# Altium PCB bluetooth_clock.PcbDoc
Units mm, origin at the board's own origin, x right, y up, seen from the top; angles counter-clockwise.
Board outline 80 x 50.01 mm, 2 copper layers (Top Layer, Bottom Layer); 56 components, 45 nets, 263 pads, 11 vias.
Unrouted connection lines stored in the file: 127.
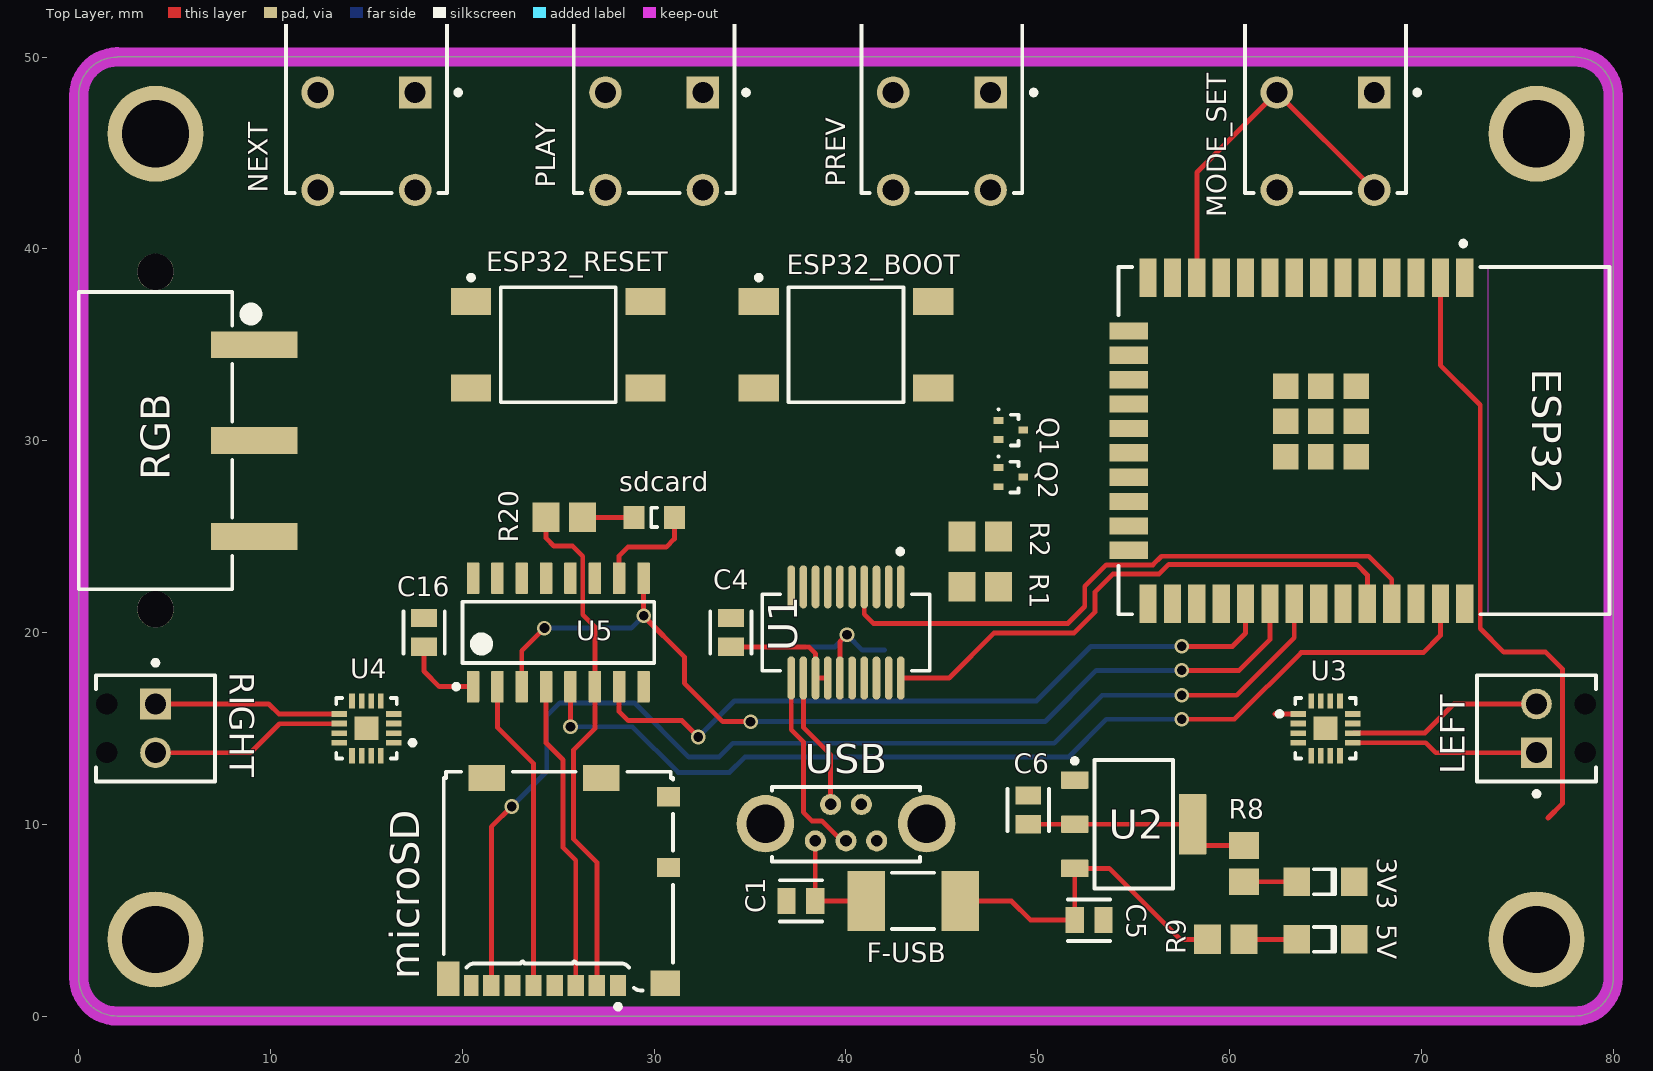
[diagram p0: Top Layer view]
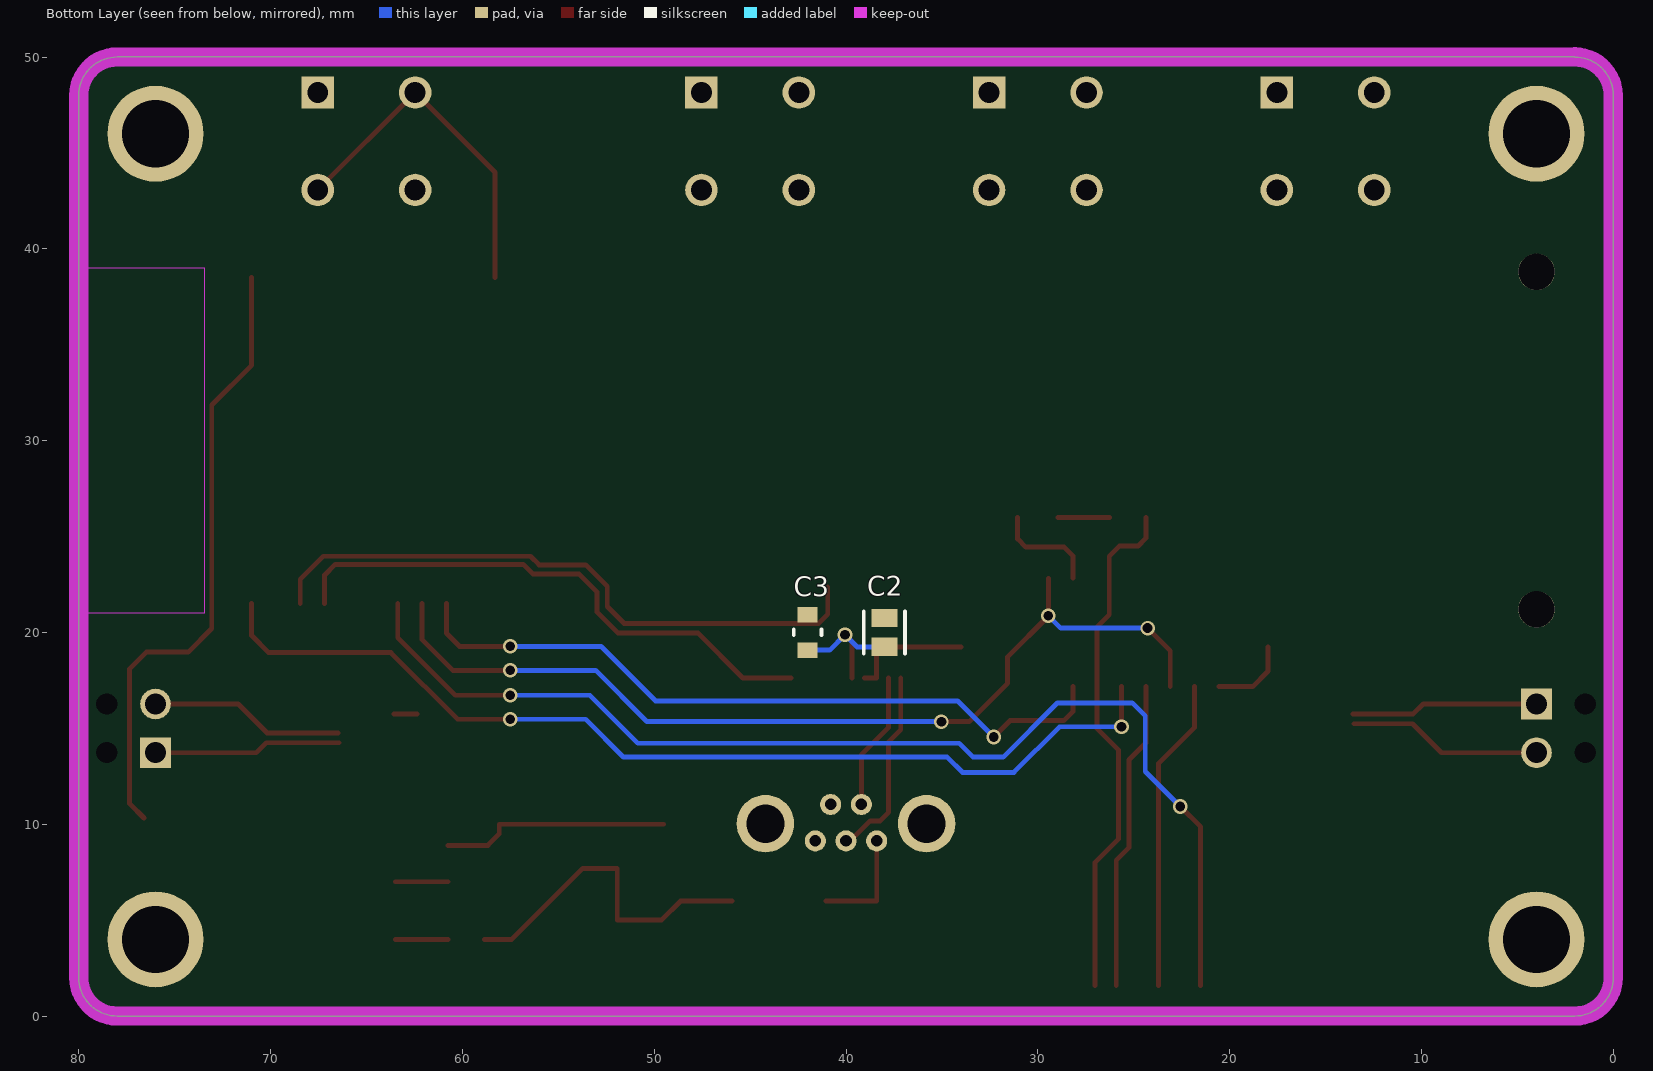
[diagram p1: Bottom Layer view, seen from below]

## Layer stack, top to bottom
Top Solder: solder mask 0.0102, Solder Resist, Dk 3.5
Top Layer: signal copper 0.0356
Dielectric 1: dielectric 0.32, FR-4, Dk 4.8
Bottom Layer: signal copper 0.0356
Bottom Solder: solder mask 0.0102, Solder Resist, Dk 3.5

## Board outline
78,50 cw(c78,48) 80,48 80,2 cw(c78,2) 78,0 2,0 cw(c2,2) 0,2 0,48 cw(c2,48) 2,50 2,50.013

## Design rules (kind name [scope] priority, off if disabled: settings)
Clearance [All] p1: gap=0.254 ignorepadtopadclearanceinfootprint=FALSE except(0: Arc-Hole Track-Hole SMDPad-Hole THPad-Hole Via-Hole Fill-Hole Poly-Hole Region-Hole Text-Hole; 0.127: Arc-Arc Arc-Track Arc-SMDPad Track-Track Track-SMDPad SMDPad-SMDPad)
PolygonConnect [All] p1: connectstyle=Relief reliefconductorwidth=0.254 reliefentries=4 polygonreliefangle="90 Angle" airgapwidth=0.254
RoutingVias [All] p1: holewidth=0.711 width=1.27 viastyle="Through Hole" minholewidth=0.711 minwidth=1.27 maxholewidth=0.711 maxwidth=1.27
SolderMaskExpansion [All] p1: expansion=0.102 istentingtop=FALSE
Width [All] p1: maxlimit=0.254 minlimit=0.254 preferedwidth=0.254
30 further rules are at their usual default settings.

## Classes and differential pairs
component class USB-ESP32: 3V3 5V C1 C2 C3 C4 C5 C6 ESP32-RX ESP32-TX F-USB Q1 Q2 R1 R2 R3 R4 R8 R9 U1 U2 USB
component class sd_card: C16 microSD R20 sdcard U5
component class ESP32: C7 ESP32 ESP32_BOOT ESP32_RESET MODE_SET NEXT PLAY PREV R12 R13 R15 R16 R17 R18 RGB
component class audio: C8 C9 C10 C11 C12 C13 C14 C15 LEFT R14 R19 RIGHT U3 U4

## Components (designator, comment, footprint, x,y, rotation, side; value= is the part's Value field where it differs from the comment)
3V3 "150120GS75000" 1206_A 65,7 r180 top
5V "150120GS75000" 1206_A 65,4 r180 top
C1 "10uF 10V 0805" FP-C0805C-DG-MFG 37.65,6 r180 top value=10uF
C2 "0.1uF 50V 0805" FP-C0805C-DN-MFG 38,20 r90 bottom value="0.10 μF"
C3 "4.7uF 50V 0805" FP-C2012-125-MFG 42,20 r90 bottom value=4.7uF
C4 "0.1uF 50V 0805" FP-C0805C-DN-MFG 34,20 r90 top value="0.10 μF"
C5 "10uF 10V 0805" FP-C0805C-DG-MFG 52.675,5 r0 top value=10uF
C6 "10uF 10V 0805" FP-C0805C-DG-MFG 49.5,10.75 r90 top value=10uF
C7 "10uF 10V 0805" FP-C0805C-DG-MFG 221.234,37.694 r0 top value=10uF
C8 "0.1uF 50V 0805" FP-C0805C-DN-MFG 160.934,7.163 r0 top value="0.10 μF"
C9 "10uF 10V 0805" FP-C0805C-DG-MFG 165.227,7.163 r0 top value=10uF
C10 "220pF 25V 0805" CAPC2013X94X50LL20T25 122.326,6.909 r90 top
C11 "220pF 25V 0805" CAPC2013X94X50LL20T25 128.473,7.468 r0 top
C12 "0.1uF 50V 0805" FP-C0805C-DN-MFG 111.785,7.163 r0 top value="0.10 μF"
C13 "10uF 10V 0805" FP-C0805C-DG-MFG 117.373,7.163 r0 top value=10uF
C14 "220pF 25V 0805" CAPC2013X94X50LL20T25 90.9,14.8 r90 top
C15 "220pF 25V 0805" CAPC2013X94X50LL20T25 85.9,14.675 r90 top
C16 "10uF 10V 0805" FP-C0805C-DG-MFG 18,20 r90 top value=10uF
ESP32 "ESP32-WROOM-32D" FP-ESP32-WROOM-32D-MFG 67,30 r270 top
ESP32-RX "150080YS75000" 0805_A 136.322,69.825 r90 top
ESP32-TX "150080YS75000" 0805_A 168.377,69.825 r90 top
ESP32_BOOT "FSM4JSMA" TECO-FSM4JSMA_V 40,35 r90 top
ESP32_RESET "FSM4JSMA" TECO-FSM4JSMA_V 25,35 r90 top
F-USB "0451002.MRL" FP-0451-MFG 43.5,6 r0 top value=0.0367Ω
LEFT "1725656" PHOE-1725656-2 76,15 r90 top
microSD "104031-0811" MOLX-104031-0811_V 25,7 r0 top
MODE_SET "1825096-4" FP-1825096-4-MFG 65,49 r270 top
NEXT "1825096-4" FP-1825096-4-MFG 15,49 r270 top
PLAY "1825096-4" FP-1825096-4-MFG 30,49 r270 top
PREV "1825096-4" FP-1825096-4-MFG 45,49 r270 top
Q1 "MMBT2222ATT1G" ONSC-SC-75-3-463-01_V 48.6,30.55 r0 top
Q2 "MMBT2222ATT1G" ONSC-SC-75-3-463-01_V 48.597,28.095 r0 top
R1 "10K 5% 0805" RESC2013X60X40ML20T25 47,22.375 r180 top
R2 "10K 5% 0805" RESC2013X60X40ML20T25 47,25 r180 top
R3 "330R 5% 0805" RESC2013X60X40ML20T25 164.033,70.256 r0 top
R4 "330R 5% 0805" RESC2013X60X40ML20T25 131.978,70.256 r0 top
R8 "1K 5% 0805" RESC2013X60X40ML20T25 60.75,7.95 r90 top
R9 "1K 5% 0805" RESC2013X60X40ML20T25 59.8,4 r180 top
R12 "10K 5% 0805" RESC2013X60X40ML20T25 189.179,37.541 r0 top
R13 "10K 5% 0805" RESC2013X60X40ML20T25 194.793,37.541 r0 top
R14 "0R 0805" RESC2013X60X35NL10T20 149.53,7.366 r0 top
R15 "10K 5% 0805" RESC2013X60X40ML20T25 94.907,21.766 r0 top
R16 "10K 5% 0805" RESC2013X60X40ML20T25 100.52,21.766 r0 top
R17 "10K 5% 0805" RESC2013X60X40ML20T25 106.159,21.766 r0 top
R18 "10K 5% 0805" RESC2013X60X40ML20T25 111.772,21.766 r0 top
R19 "370K 1% 0805" RESC2013X60X35NL10T20 100.406,7.366 r0 top
R20 "1K 5% 0805" RESC2013X60X40ML20T25 25.315,26 r180 top
RGB "691709710303" 691709710303 4,30 r270 top
RIGHT "1725656" PHOE-1725656-2 4,15 r270 top
sdcard "150080YS75000" 0805_A 30,26 r0 top
U1 "FT231XS-R" FP-SSOP-20-MFG 40,20 r270 top
U2 "LM1117MP-3.3/NOPB" DCY0004A_L 55,10 r0 top
U3 "MAX98357AETE+" FP-T1633-4-MFG 65,15 r0 top
U4 "MAX98357AETE+" FP-T1633-4-MFG 15,15 r180 top
U5 "CD74HC4050M" D0016A_M 25,20 r90 top
USB "651005136421" 651005136421 40,10 r0 top

## Footprints (in the part's own frame and the unit in brackets; to place one, negate y for a bottom-side part, rotate by r counter-clockwise, add the part's x,y. Pads: shape width x height; smd on the part's side, far side on the other; paste and mask are expansions set on the pad)
0805_A [mm] "Chip LED, 2-Leads, Body 2.0x1.3mm, IPC Medium Density"
  rect 1.1x1.2 smd: 1(-1.05,0) 2(1.05,0)
  silkscreen extent -0.15,-0.5 0.15,0.5, body extent -1,-0.62 1,0.63, height 0.68
1206_A [mm] "Chip LED, 2-Leads, Body 3.2x1.6mm, IPC Medium Density"
  rect 1.4x1.5 smd: 1(-1.5,0) 2(1.5,0)
  silkscreen extent -0.5,-0.67 0.6,0.65, body extent -1.6,-0.8 1.6,0.8, height 0.68
651005136421 [mm] "Mini USB 2.0 Type B Vertical 5 Contacts"
  round 1.1 hole 0.6: 1(-1.6,-0.87) 2(-0.8,1.03) 3(0,-0.87) 4(0.8,1.03) 5(1.6,-0.87)
  round 3 hole 2: Shell(-4.2,0.03) Shell(4.2,0.03)
  silkscreen extent -3.85,-1.95 3.85,1.95, body extent -5.1,-1.92 5.1,1.98, height 9.4
691709710303 [mm] "Horizontal Entry SMT with Pressure Clamp, pitch 5mm, 03p"
  rect 1.4x4.5 smd: 1(-5,5.15) 2(0,5.15) 3(5,5.15)
  round 1.9 hole 1.9 unplated: M1(-8.8,0) M2(8.8,0)
  silkscreen extent -7.75,-4 7.75,5.17, body extent -9.5,-4 9.5,7, height 9.95
CAPC2013X94X50LL20T25 [mm] "Chip Capacitor, 2-Leads, Body 2.01x1.25mm, IPC High Density"
  rect 1.15x1.35 smd: 1(-0.725,0) 2(0.725,0)
  body extent -1.1,-0.72 1.1,0.72, height 0.94
D0016A_M [mm] "SOIC, 16-Leads, Body 10x4mm, Pitch 1.27mm, IPC Low Density"
  rrect15% 1.65x0.65 smd: 1(-2.825,4.445) 2(-2.825,3.175) 3(-2.825,1.905) 4(-2.825,0.635) 5(-2.825,-0.635) 6(-2.825,-1.905) 7(-2.825,-3.175) 8(-2.825,-4.445) 9(2.825,-4.445) 10(2.825,-3.175) 11(2.825,-1.905) 12(2.825,-0.635) 13(2.825,0.635) 14(2.825,1.905) 15(2.825,3.175) 16(2.825,4.445)
  silkscreen extent -2.95,-5 1.6,5.44, body extent -3,-4.95 3,4.95, height 1.59
DCY0004A_L [mm] "SOT223, 4-Leads, Body 6.7x3.7mm, Pitch 2.3mm, IPC High Density"
  rrect11% 1.45x0.9 smd: 1(-3.075,2.3) 2(-3.075,0) 3(-3.075,-2.3)
  rrect7% 1.45x3.15 smd: 4(3.075,0)
  silkscreen extent -3.2,-3.35 2.05,3.42, body extent -3.5,-3.25 3.5,3.25, height 1.62
FP-0451-MFG [mil]
  rect 77x124 smd paste+0 mask+0: 1(-96.5,0) 2(96.5,0)
  silkscreen extent -43,-58 43,58, body extent -139,-66 139,66, height 10
FP-1825096-4-MFG [mil]
  rect 66.62x66.62 hole 43 paste-39370.1 mask+0: 1(33.5,100)
  round 66.62 hole 43 paste-39370.1 mask+0: 3(33.5,-100) 4(233.5,-100) 5(233.5,100)
  silkscreen extent -260,-165 240,193, body extent -263,-169 271,169, height 10
FP-C0805C-DG-MFG [mm]
  rect 0.95x1.35 smd paste+0 mask+0: 1(-0.75,0) 2(0.75,0)
  silkscreen extent -1.11,-1.08 1.1,1.07, body extent -1.4,-0.85 1.4,0.85, height 0.25
FP-C0805C-DN-MFG [mm]
  rect 0.95x1.35 smd paste+0 mask+0: 1(-0.75,0) 2(0.75,0)
  silkscreen extent -1.1,-1.07 1.1,1.07, body extent -1,-0.63 1,0.63, height 0.88
FP-C2012-125-MFG [mm]
  rect 0.8x1.05 smd paste+0 mask+0: 1(-0.925,0) 2(0.925,0)
  silkscreen extent -0.15,-0.72 0.15,0.72, body extent -1.01,-0.72 0.99,0.73, height 1.45
FP-ESP32-WROOM-32D-MFG [mm]
  rect 2x0.9 smd paste+0 mask+0: 1(-8.5,5.26) 2(-8.5,3.99) 3(-8.5,2.72) 4(-8.5,1.45) 5(-8.5,0.18) 6(-8.5,-1.09) 7(-8.5,-2.36) 8(-8.5,-3.63) 9(-8.5,-4.9) 10(-8.5,-6.17) 11(-8.5,-7.44) 12(-8.5,-8.71) 13(-8.5,-9.98) 14(-8.5,-11.25) 25(8.5,-11.25) 26(8.5,-9.98) 27(8.5,-8.71) 28(8.5,-7.44) 29(8.5,-6.17) 30(8.5,-4.9) 31(8.5,-3.63) 32(8.5,-2.36) 33(8.5,-1.09) 34(8.5,0.18) 35(8.5,1.45) 36(8.5,2.72) 37(8.5,3.99) 38(8.5,5.26)
  rect 0.9x2 smd paste+0 mask+0: 15(-5.715,-12.25) 16(-4.445,-12.25) 17(-3.175,-12.25) 18(-1.905,-12.25) 19(-0.635,-12.25) 20(0.635,-12.25) 21(1.905,-12.25) 22(3.175,-12.25) 23(4.445,-12.25) 24(5.715,-12.25)
  rect 1.33x1.33 smd paste+0 mask+0: 39(-2.835,-0.405) 39(-2.835,-2.24) 39(-2.835,-4.075) 39(-1,-0.405) 39(-1,-2.24) 39(-1,-4.075) 39(0.835,-0.405) 39(0.835,-2.24) 39(0.835,-4.075)
  Keep-Out Layer region: -9,6.45 9,6.45 9,12.75 -9,12.75
  Keep-Out Layer region: -9,6.45 9,6.45 9,12.75 -9,12.75
  silkscreen extent -10.4,-12.8 9.05,12.8, body extent -9.6,-13.35 9.6,12.9, height 0.25
FP-SSOP-20-MFG [mm]
  rrect100% 2.25x0.4 smd paste+0 mask+0: 1(-2.375,2.857) 2(-2.375,2.222) 3(-2.375,1.587) 4(-2.375,0.952) 5(-2.375,0.317) 6(-2.375,-0.318) 7(-2.375,-0.953) 8(-2.375,-1.588) 9(-2.375,-2.223) 10(-2.375,-2.858) 11(2.375,-2.857) 12(2.375,-2.222) 13(2.375,-1.587) 14(2.375,-0.952) 15(2.375,-0.317) 16(2.375,0.318) 17(2.375,0.953) 18(2.375,1.588) 19(2.375,2.223) 20(2.375,2.858)
  silkscreen extent -4.34,-4.37 1.99,4.37, body extent -3.6,-4.62 3.6,4.62, height 0.25
FP-T1633-4-MFG [mm]
  rect 0.8x0.3 smd paste+0 mask+0: 1(-1.425,0.75) 2(-1.425,0.25) 3(-1.425,-0.25) 4(-1.425,-0.75) 9(1.425,-0.75) 10(1.425,-0.25) 11(1.425,0.25) 12(1.425,0.75)
  rect 0.3x0.8 smd paste+0 mask+0: 5(-0.75,-1.425) 6(-0.25,-1.425) 7(0.25,-1.425) 8(0.75,-1.425) 13(0.75,1.425) 14(0.25,1.425) 15(-0.25,1.425) 16(-0.75,1.425)
  rect 1.23x1.23 smd paste+0 mask+0: 17(0,0)
  silkscreen extent -2.52,-1.58 1.58,1.58, body extent -1.92,-1.92 1.92,1.92, height 0.25
MOLX-104031-0811_V [mm] "Micro SD, 8-Leads, Body 11.95x11.4mm, Pitch 1.1mm"
  rect 0.85x1.1 smd: 1(3.113,-5.412) 2(2.013,-5.412) 3(0.913,-5.412) 4(-0.188,-5.412) 5(-1.288,-5.412) 6(-2.387,-5.412) 7(-3.487,-5.412)
  rect 0.75x1.1 smd: 8(-4.537,-5.412)
  rect 1.2x1 smd: 9(5.748,0.738) 10(5.748,4.438)
  rect 1.55x1.35 smd: 11(5.573,-5.287)
  rect 1.17x1.8 smd: 12(-5.747,-5.062)
  rect 1.9x1.35 smd: 13(-3.722,5.413) 14(2.248,5.413)
  silkscreen extent -5.97,-6.64 5.98,5.74, body extent -5.97,-5.66 5.98,5.74, height 1.45
ONSC-SC-75-3-463-01_V [mil] "SOT23, 3-Leads, Body 1.6x0.8mm, Pitch 0.5mm"
  rect 20x14.02 smd: 1(-25.49,19.68) 2(-25.49,-19.69) 3(25.49,0)
  silkscreen extent -27,-31 16,44, body extent -16,-31 16,31, height 35
PHOE-1725656-2 [mm] "Connector, 2-Leads, Body 6.2x5.4mm, Pitch 2.54mm"
  rect 1.6x1.6 hole 1.1: 1(-1.27,0)
  round 1.6 hole 1.1: 2(1.27,0)
  round 0 hole 1.1 unplated: MH1(-1.27,-2.54) MH2(1.27,-2.54)
  silkscreen extent -3.54,-3.1 2.77,3.1, body extent -2.77,-3.1 2.77,3.1, height 9
RESC2013X60X35NL10T20 [mm] "Chip Resistor, 2-Leads, Body 2.00x1.25mm, IPC Medium Density"
  rect 1x1.35 smd: 1(-0.9,0) 2(0.9,0)
  silkscreen extent -0.1,-0.58 0.1,0.58, body extent -1.05,-0.67 1.05,0.67, height 0.6
RESC2013X60X40ML20T25 [mm] "Chip Resistor, 2-Leads, Body 2.00x1.25mm, IPC Low Density"
  rect 1.4x1.55 smd: 1(-0.95,0) 2(0.95,0)
  body extent -1.1,-0.72 1.1,0.72, height 0.6
TECO-FSM4JSMA_V [mm] "SMD, 4-Leads, Body 6x6mm, Pitch 4.5mm"
  rect 1.4x2.1 smd: 1(2.25,4.55) 2(2.25,-4.55) 3(-2.25,4.55) 4(-2.25,-4.55)
  silkscreen extent -3,-3 3.62,4.67, body extent -3,-5 3,5, height 5.08

## Part data
3V3 5V: library part CMP-1426-00014-1, "SMD mono-color Chip LED, WL-SMCW, Green", Color=Green, Manufacturer="Wuerth Elektronik", ComponentLink1Description="Manufacturer URL", ComponentLink1URL=http://www.we-online.com, ComponentLink2Description=Datasheet, ComponentLink2URL=http://katalog.we-online.com/led/datasheet/150120GS75000.pdf, PackageReference=1206_A, PartNumber=150120GS75000
C1 C5 C6 C7 C9 C13 C16: library part CMP-2007-03243-2, "CAP CER 10UF 10V X5R 0805", 3DS Part Number=220-00001, Capacitance=10uF, Manufacturer=Kemet, Manufacturer Part Number=C0805C106K8PACTU, Package=C0805C-DG, Temperature="-55°C to +85°C", Temperature Characteristic=X5R, Temperature Coefficient=15%, Temperature Range High=+85°C, Temperature Range Low=-55°C, Tolerance=10%, Voltage=10V, Automotive=No, Category=Cap, ComponentLink2Description=Datasheet, ComponentLink2URL=https://content.kemet.com/datasheets/KEM_C1006_X5R_SMD.pdf, Device Class L1="Passive Components", Device Class L2=Capacitors, Device Class L3="Ceramic Capacitors", Digikey Description="CAP CER 10UF 10V X5R 0805", Height=1.4mm, Ipc Land Pattern Name=CAPC200125X125, Lead Free=Yes, Material=Ceramic, Mouser Description="CAP CER 10UF 10V X5R 0805", Octopart=https://octopart.com/c0805c106k8pactu-kemet-98697, RoHS=TRUE, Voltage Rating=10V
C2 C4 C8 C12: library part CMP-2007-00279-2, "CAP CER 0.1UF 50V X7R 0805", Capacitance="0.10 μF", Manufacturer=KEMET, Manufacturer Part Number=C0805C104K5RACTU, Package=C0805C-DN, Temperature="-55°C to +125°C", Temperature Characteristic=X7R, Temperature Coefficient=30ppm/°C, Temperature Range High=+125°C, Temperature Range Low=-55°C, Tolerance=0.1, Voltage Rating="50 V", Automotive=No, Category=Cap, ComponentLink2Description=Datasheet, ComponentLink2URL=https://content.kemet.com/datasheets/KEM_C1003_C0G_SMD.pdf, Device Class L1="Passive Components", Device Class L2=Capacitors, Device Class L3="Ceramic Capacitors", Digikey Description="CAP CER 0.1UF 50V X7R 0805", Height=0.88mm, Ipc Land Pattern Name=CAPC200125X78, Lead Free=Yes, Material=Ceramic, Mouser Description="Cap Ceramic 0.1uF 50V X7R 10% SMD 2.0 x 1.2 mm 125 C Paper T/R", Octopart=https://octopart.com/c0805c104k5ractu-kemet-143926, RoHS=TRUE
C3: library part CMP-08246-000007-1, "CAP CER 4.7UF 50V X5R 0805", Capacitance=4.7uF, Manufacturer="TDK Corporation", Manufacturer Part Number=C2012X5R1H475K125AB, Package=C2012-125, Temperature="-55°C to +85°C", Temperature Characteristic=X5R, Temperature Coefficient=15%, Temperature Range High=+85°C, Temperature Range Low=-55°C, Tolerance=10%, Voltage Rating=50V, Automotive=No, Category=Cap, ComponentLink2Description=Datasheet, ComponentLink2URL=https://product.tdk.com/info/en/catalog/datasheets/mlcc_commercial_general_en.pdf, Device Class L1="Passive Components", Device Class L2=Capacitors, Device Class L3="Ceramic Capacitors", Digikey Description="CAP CER 4.7UF 50V X5R 0805", Height=1.45mm, Lead Free=Yes, Material=Ceramic, Mouser Description="Multilayer Ceramic Capacitors MLCC - SMD/SMT 0805 4.7uF 50volts X5R 10%", Octopart=https://octopart.com/c2012x5r1h475k125ab-tdk-25947720, RoHS=TRUE
C10 C11 C14 C15: library part CMP-2007-04219-1, Manufacturer="AVX Interconnect / Elco", Part Number=08053A221JAT2A
ESP32: library part CMP-194065-000003-1, "WIFI MODULE 32MBITS SPI FLASH", Manufacturer="Espressif Systems", Max Frequency=2484MHz, Max Supply Voltage=3.6V, Min Supply Voltage=3V, Nominal Supply Current=500mA, Temperature="-40°C to +85°C", Temperature Range High=+85°C, Temperature Range Low=-40°C, Automotive=No, Bandwidth=72MHz, Category=UNK, ComponentLink2Description=Datasheet, ComponentLink2URL=https://www.espressif.com/sites/default/files/documentation/esp32-wroom-32d_esp32-wroom-32u_datasheet_en.pdf, Data Rate=150Mbits/s, Device Class L1="Integrated Circuits (ICs)", Device Class L2="RF Semiconductors and Devices", Device Class L3=Transceivers, Digikey Description="WIFI MODULE 32MBITS SPI FLASH", Height=3.2mm, Interface=I2C,SPI,UART,Ethernet,I2S,Other, Lead Free=Yes, Manufacturer Part Number=ESP32-WROOM-32D, Mouser Description="Wi-Fi/BT BLE Module ESP32-D0WD, SPI Flash, UART, P", Number Of Adc Channels=16, Number Of Gpio=32, Octopart=https://octopart.com/esp32-wroom-32d-espressif+systems-91040050, Package=ESP32-WROOM-32D, RoHS=TRUE, Sensitivity=-98dBm
ESP32-RX ESP32-TX sdcard: library part CMP-1426-00012-1, "SMD mono-color Chip LED, WL-SMCW, Yellow", Color=Yellow, Manufacturer="Wuerth Elektronik", ComponentLink1Description="Manufacturer URL", ComponentLink1URL=http://www.we-online.com, ComponentLink2Description=Datasheet, ComponentLink2URL=http://katalog.we-online.com/led/datasheet/150080YS75000.pdf, PackageReference=0805_A, PartNumber=150080YS75000
ESP32_BOOT ESP32_RESET: library part CMP-2000-05602-2, "Swicth, SPST, 24 V, -35 to 85 degC, 4-Pin SMD, RoHS, Tape and Reel", Case\/Package=SMD/SMT, Contact Current Rating=50mA, Contact Resistance=100mOhm, Manufacturer="TE Connectivity", Max Operating Temperature=85degC, Max Voltage Rating (DC)=12V, Min Operating Temperature=-35degC, Operating Force=1.57N, Package Description="4-Pin Surface Mount Device, Body 6 x 6 mm, Pitch 4.5 mm", Package Quantity=750, Voltage Rating=24V, Actuator Length=0.055inch, Actuator Material=Polyamide, Contact Material=CopperAlloy, Contact Plating=Silver, Current Rating=50mA, Datasheet URL=http://www.te.com/commerce/DocumentDelivery/DDEController?Action=showdoc&DocId=Customer+Drawing%7F2-1437565-7%7FV%7Fpdf%7FEnglish%7FENG_CD_2-1437565-7_V.pdf%7F4-1437565-2, Datasheet Version="Rev. V, 02/2015", Electrical Life=100000Cycles, Illumination Type=Illuminated, Length=6mm, Manufacturer URL=http://www.te.com/, Mechanical Life=100000Cycles, Mount=SurfaceMount, Mounting Technology=SurfaceMount, Orientation=Straight, Package Reference=FSM4JSMA, Packaging=LoosePiece, REACH SVHC=Unknown, RoHSCompliant=true, Switch Travel=0.25mm, Termination=GullWing, Throw Configuration=SPST, Voltage Rating (DC)=24V, Width=6mm
F-USB: library part CMP-08605-000053-1, "FUSE BOARD MNT 2A 125VAC/VDC SMD", Fuse Current=2A, Fuse Interrupt Ac Current=50A, Manufacturer=Littelfuse, Max Fuse Ac Voltage=125V, Package=0451, Resistance=0.0367Ω, Temperature="-55°C to +125°C", Temperature Range High=+125°C, Temperature Range Low=-55°C, Automotive=No, Category=Fuse, ComponentLink2Description=Datasheet, ComponentLink2URL=https://www.littelfuse.com/~/media/electronics/datasheets/fuses/littelfuse_fuse_451_453_datasheet.pdf.pdf, Device Class L1="Circuit Protection", Device Class L2=Fuses, Device Class L3=unset, Digikey Description="FUSE BOARD MNT 2A 125VAC/VDC SMD", Fuse Blow Speed=Fast, Fuse I2T=0.53A2Sec, Fuse Interrupt Dc Current=50A, Height=2.94mm, Lead Free=Yes, Manufacturer Part Number=0451002.MRL, Max Fuse Dc Voltage=125V, Mouser Description="Surface Mount Fuses 125V 2A", Octopart=https://octopart.com/0451002.mrl-littelfuse-566376, RoHS=TRUE, Voltage Rating=125V
LEFT RIGHT: library part CMP-2000-05299-1, "Male Header, Pitch 2.54 mm, 1 x 2 Position, Height 9 mm, Tail Length 3.5 mm", Colour=Green, Manufacturer="Phoenix Contact", Content=250pc(s), Datasheet URL=http://datasheet.octopart.com/1725656-Phoenix-Contact-datasheet-5302866.pdf, Datasheet Version=Apr-08, Industrial packaging=Yes, Manufacturer part No.=1725656, Manufacturer URL=http://www.phoenixcontact.com/, Number of contacts=2, Pitch=2.54mm, Type=MPT0,5/2-2,54
microSD: library part CMP-2000-05825-1, "Micro SD Card, RA, -25 to 85 degC, 8-Pin SMD, RoHS, Tape and Reel", Current Rating=500mA, Manufacturer=Molex, Package Description="8-Pin Surface Mount Device, Body 11.95 x 11.4 mm, Pitch 1.1 mm", Voltage Rating=10VAC/DC, Brand=Molex, Card Type=microSD, Contact Material=PhosphorBronze, Contact Plating=Gold, Datasheet URL=http://www.molex.com/pdm_docs/sd/1040310811_sd.pdf, Datasheet Version="Rev. E, 04/2006", Height=1.42mm, Housing Material=LiquidCrystalPolymer(LCP), Insertion - Extraction Style=Push-Pull, Length=11.4mm, Manufacturer URL=http://www.molex.com/, Mating Cycles=10000, Mounting Technology=SurfaceMount, Mounting Type=Standard, Number of contacts=8, Number of Rows=1Row, Orientation=RightAngle, Package Reference=104031-0811, Packaging=Reel, Pitch=1.1mm, Product=CardConnectors, Product Category=MemoryCardConnectors, RoHS=True, Series=104031, Termination Style=SMD
MODE_SET NEXT PLAY PREV: library part CMP-03402-000007-1, "SWITCH PUSH SPST-NO 0.4VA 20V", Actuator Color=Black, Contact Current Rating=400mA, Contact Resistance=20mR, Max Operating Temperature=65°C, Max Voltage Rating (AC)=20V, Min Operating Temperature=-30°C, Operating Force=3.92N, Package Quantity=25, Actuator Length=3.84mm, Actuator Material=Thermoplastic, Contact Material="Copper Alloy", Contact Plating=Gold, Depth=12.9mm, Electrical Life=100000Cycles, Illumination Color=Black, Illumination Type=Illuminated, Length=8.13mm, Max Voltage Rating (DC)=20V, Mount="Through Hole", Orientation="Right Angle", Packaging=Bulk, RoHS Compliant=Yes, Series="TP, Alcoswitch", Switch Function=Off-Mom, Termination="PC Pins", Throw Configuration=SPST, Type=Switch, Voltage Rating (AC)=20V, Voltage Rating (DC)=20V
Q1 Q2: library part CMP-1048-00417-1, "General Purpose Transistor, NPN Silicon, 3-Pin SC-75, Pb-Free, Tape and Reel", Manufacturer="On Semiconductor", ComponentLink1Description="Manufacturer URL", ComponentLink1URL=http://www.onsemi.com/, ComponentLink2Description=Datasheet, ComponentLink2URL=http://www.onsemi.cn/pub_link/Collateral/MMBT2222ATT1-D.PDF, ComponentLink3Description="Package Specification", ComponentLink3URL=http://www.onsemi.com/pub_link/Collateral/463-01.PDF, DatasheetVersion="Rev. 5", fT Min (MHz)=300, IC Continuous (A)=0.6, Mounting Technology="Surface Mount", PackageDescription="3-Pin Small Outline Transistor, Body 1.6 x 0.8 mm, Pitch 0.5 mm", PackageReference=SC-75-3-463-01, PackageVersion="Rev. F, 07/2005", Packing="Tape and Reel", PartNumber=MMBT2222ATT1G, Polarity=NPN, RoHS=TRUE
R1 R2 R3 R4 R8 R9 R12 R13 R15 R16 R17 R18 R20: library part CMP-2001-00590-1, Manufacturer=Panasonic, Part Number=ERA6AEB123V
R14 R19: library part CMP-2001-01791-1, Manufacturer=Yageo, Part Number=RV0805FR-071ML
RGB: library part CMP-1502-03336-1, "Serie 7097 - 5.00 mm Horizontal Entry SMT with Pressure Clamp WR-TBL, 3 pin", Manufacturer="Wurth Elektronik", Operating Temperature=-45to130degC, Datasheet URL=http://katalog.we-online.de/em/datasheet/6917097103xx.pdf, Manufacturer URL=http://www.we-online.de, Mounting Technology=SMT, Package Reference=691709710303, Packaging=TapeandReelwithCap, Part Number=691709710303, Pin Number=3, Pitch=5.00mm, Publisher=WurthElektronik
U1: library part CMP-0248-00024-3, "IC USB SERIAL FULL UART 20SSOP", Case/Package=SSOP, Max Operating Temperature=85°C, Max Supply Voltage=5.5V, Min Operating Temperature=-40°C, Min Supply Voltage=2.97V, Operating Supply Current=8mA, Operating Supply Voltage=5V, Package Quantity=2000, Data Rate=12Mbps, Height=0.059inch, Interface=UART, Length=8.74mm, Mount="Surface Mount", Number of Channels=1, Number of Pins=20, Packaging="Tape and Reel", Radiation Hardening=No, Weight=0.016oz, Width=0.157inch
U2: library part CMP-0062-01638-4, "800mA Low-Dropout Linear Regulator, 4-pin SOT-223, Pb-Free", Manufacturer="Texas Instruments", PackageTopMarking=XYTT*N05A, PowerWise=N, Code_IPC=SOT223-4, Code_JEDEC=TO-261-AA, ComponentLink1Description="Datasheet URL", ComponentLink1URL=http://www.ti.com/general/docs/lit/getliterature.tsp?genericPartNumber=LM1117-N&fileType=pdf, CompType="LDO IC", High-Reliability=Y, PackageDescription="Molded SOT-223, 6.50 x 3.56 x 1.6mm Body, 4 Lead, 2.3mm Pitch", PackageReference=DCY0004A, PartNumber=LM1117MP-3.3/NOPB, PinCount=4, RoHS=Y
U3 U4: library part CMP-05698-000004-1, "IC AMP CLASS D MONO 3.2W 16TQFN", Max Operating Temperature=85°C, Max Output Current=1.6A, Max Output Power=3.2W, Max Power Dissipation=1.666W, Max Supply Voltage=5.5V, Min Operating Temperature=-40°C, Min Supply Voltage=2.5V, Operating Supply Current=2.75mA, Operating Supply Voltage=5V, Package Quantity=490, Power Supply Rejection Ratio (PSRR)=77dB, Voltage Gain=15dB, Contact Plating=Tin, Gain=15dB, Load Impedance=4R, Mount="Surface Mount", Number of Channels=1, Number of Pins=16, Output Power=3.2W, Packaging=Rail/Tube, Radiation Hardening=No, Supply Type=Single
U5: library part CMP-0440-00356-3, "High Speed CMOS Logic Hex Non-Inverting Buffers, D0016A, TUBE", F @ Nom Voltage(Max)(Mhz)=28, Generic Part Number=CD74HC4050, ICC @ Nom Voltage(Max)(mA)=0.02, Manufacturer="Texas Instruments", Operating Temperature Range(C)="-55 to 125", Rating=Catalog, tpd @ Nom Voltage(Max)(ns)=18, Voltage(Nom)(V)=6, Bits(#)=6, Code_JEDEC="MS-012 variation AC", DatasheetVersion=SCHS205I, Input Type=CMOS, Output Type=CMOS, PackageReference=D0016A, PackageVersion=http://www.ti.com/lit/ml/mpds178g/mpds178g.pdf, VCC(Max)(V)=6, VCC(Min)(V)=2
USB: library part CMP-1502-03248-1, "Mini USB 2.0 Type B Receptacle WR-COM, Vertical, THT", Contact Resistance=20mOhm, Manufacturer="Wurth Elektronik", Operating Temperature=-40to105degC, Rated Current=1A, Working Voltage=30VAC, Connector Type=MiniUSB2.0TypeB, Datasheet URL=https://katalog.we-online.de/em/datasheet/651005136421%282%29.pdf, Gender=Receptacle, Manufacturer URL=http://www.we-online.de, Mounting Technology=THT, Orientation=Vertical, Package Reference=651005136421, Packaging=Tray, Part Number=651005136421, Publisher=WurthElektronik

## Free pads (board coordinates)
  round 5 hole 3.5: 2(4,4) 2(4,46) 2(76,4) 2(76,46)

## Via types
v1: diameter 0.762, hole 0.508, Top Layer to Bottom Layer, 11 vias

## Nets (pads, with @x,y where several pads share a name; then routed paths per layer and width w, separated by ;. In a path a pad name is that pad's centre, name@x,y a point inside that pad or via, vN(x,y) a via of type N, cw(c..) or ccw(c..) an arc to the next point about the centre after c; other vN are vias at no path point)
+3V3: C6.1 C7.1 C16.1 ESP32.2 microSD.4 MODE_SET.1 MODE_SET.4 NEXT.1 NEXT.4 PLAY.1 PLAY.4 PREV.1 PREV.4 R3.1 R4.1 R8.2 R12.2 R13.2 U2.2 U2.4 U5.1 | length 48.6
  Top Layer w0.254: C16.1 18,17.975 18.8,17.175 U5.1 ; C6.1 U2.2 U2.4 58.075,9.498 58.673,8.9 R8.2 ; ESP32.2 70.99,33.935 73.069,31.856 73.069,20.206 74.3,18.975 76.475,18.975 77.35,18.1 77.35,11.075 76.6,10.325
+5_USB_IN: C1.1 F-USB.1 USB.1 | length 5.8
  Top Layer w0.254: USB.1 C1.1 F-USB.1
+5V: C2.1 C3.1 C5.1 C8.1 C9.1 C12.1 C13.1 F-USB.2 R9.2 R14.2 R19.2 RGB.1 U1.15 U2.3 U3.7 U3.8 U4.7 U4.8 | length 24.5
  Top Layer w0.254: U1.15 39.682,19.507 v1(40.05,19.875) ; F-USB.2 48.625,6 49.625,5 C5.1 U2.3 53.725,7.7 57.425,4 R9.2
  Bottom Layer w0.254: C2.1 39.425,19.25 v1(40.05,19.875) 40.85,19.075 C3.1
BCLK: ESP32.11 U3.16 U4.16
DIN: ESP32.36 U3.1 U4.1 | length 1.2
  Top Layer w0.254: 62.375,15.75 U3.1
ESP32_RX: ESP32.34 U1.20 | length 29.1
  Top Layer w0.254: U1.20 45.375,17.625 47.725,19.975 51.9,19.975 52.975,21.05 52.975,22.1 53.925,23.05 56.325,23.05 56.825,23.55 66.625,23.55 67.18,22.995 ESP32.34
ESP32_TX: ESP32.35 U1.4 | length 33
  Top Layer w0.254: U1.4 40.952,20.948 41.425,20.475 51.575,20.475 52.45,21.35 52.45,22.4 53.575,23.525 56,23.525 56.45,23.975 67.25,23.975 68.45,22.775 ESP32.35
GND: 3V3.1 5V.1 C1.2 C2.2 C3.2 C4.2 C5.2 C6.2 C7.2 C8.2 C9.2 C10.1 C11.1 C12.2 C13.2 C14.1 C15.1 C16.2 ESP32.1 ESP32.15 ESP32.38 ESP32.39 ESP32_BOOT.3 ESP32_RESET.3 microSD.6 microSD.11 microSD.12 pad.2 R15.1 R16.1 R17.1 R18.1 RGB.3 U1.6 U1.16 U2.1 U3.3 U3.11 U3.15 U3.17 U4.3 U4.11 U4.15 U4.17 U5.8 U5.11 U5.14 USB.5 USB.Shell
GPIO0: ESP32.25 ESP32_BOOT.2 Q2.3 R13.1
"GPIO5 / VSPI_CS": ESP32.29 U5.7 | length 38.3
  Top Layer w0.254: U5.7 28.175,15.875 28.65,15.4 31.45,15.4 v1(32.3,14.55) ; v1(57.5,19.275) 60.15,19.275 60.83,19.955 ESP32.29
  Bottom Layer w0.254: v1(32.3,14.55) 34.175,16.425 49.925,16.425 52.775,19.275 v1(57.5,19.275)
"GPIO18 / VSPI_SCK": ESP32.30 U5.3 U5.9 | length 50.3
  Top Layer w0.254: U5.3 23.095,19.045 v1(24.275,20.225) ; U5.9 29.445,20.855 31.575,18.725 31.575,17.35 33.575,15.35 v1(35.025,15.35) ; v1(57.5,18.025) 60.5,18.025 62.1,19.625 ESP32.30
  Bottom Layer w0.254: v1(24.275,20.225) 28.8,20.225 v1(29.45,20.875) ; v1(35.025,15.35) 50.375,15.35 53.05,18.025 v1(57.5,18.025)
"GPIO19 / VSPI_MISO": ESP32.31 microSD.7 | length 60
  Top Layer w0.254: microSD.7 21.513,9.863 v1(22.575,10.925) ; v1(57.5,16.725) 60.375,16.725 63.37,19.72 ESP32.31
  Bottom Layer w0.254: v1(22.575,10.925) 24.4,12.75 24.4,15.65 25.075,16.325 28.975,16.325 31.8,13.5 33.375,13.5 34.1,14.225 50.85,14.225 53.35,16.725 v1(57.5,16.725)
"GPIO23 / VSPI_MOSI": ESP32.37 U5.5 | length 53.1
  Top Layer w0.254: v1(25.635,15.085) U5.5 ; v1(57.5,15.475) 60.25,15.475 63.725,18.95 70.1,18.95 70.99,19.84 ESP32.37
  Bottom Layer w0.254: v1(25.635,15.085) 28.865,15.085 31.25,12.7 33.925,12.7 34.725,13.5 51.6,13.5 53.575,15.475 v1(57.5,15.475)
LRCLK: ESP32.10 U3.14 U4.14
MODE_SET: ESP32.12 MODE_SET.3 MODE_SET.5 R15.2 | length 18.6
  Top Layer w0.254: ESP32.12 58.29,43.979 MODE_SET.3 MODE_SET.5
Net3V3_2: 3V3.2 R8.1 | length 2.7
  Top Layer w0.254: R8.1 3V3.2
Net5V_2: 5V.2 R9.1 | length 2.8
  Top Layer w0.254: R9.1 5V.2
NetC4_1: C4.1 U1.3 U1.13 U1.14 | length 6.5
  Top Layer w0.254: C4.1 38.05,19.25 38.412,18.888 U1.13 U1.14
NetC10_2: C10.2 LEFT.1 U3.9 | length 9.8
  Top Layer w0.254: U3.9 70.225,14.25 70.745,13.73 LEFT.1
NetC11_2: C11.2 LEFT.2 U3.10 | length 10.2
  Top Layer w0.254: U3.10@66.475,14.758 70.183,14.758 71.695,16.27 LEFT.2
NetC14_2: C14.2 RIGHT.1 U4.9 | length 9.8
  Top Layer w0.254: RIGHT.1 9.905,16.27 10.425,15.75 U4.9
NetC15_2: C15.2 RIGHT.2 U4.10 | length 10.2
  Top Layer w0.254: RIGHT.2 8.955,13.73 10.467,15.242 U4.10@13.525,15.242
NetESP32-RX_2: ESP32-RX.2 R4.2
NetESP32-TX_2: ESP32-TX.2 R3.2
NetQ1_1: Q1.1 R1.1
NetQ2_1: Q2.1 R2.1
NetR20_1: R20.1 sdcard.1 | length 2.7
  Top Layer w0.254: R20.1 sdcard.1
Netsdcard_2: sdcard.2 U5.10 | length 5.5
  Top Layer w0.254: U5.10 28.175,24 28.625,24.45 30.625,24.45 31.05,24.875 sdcard.2
NEXT_TRACK: ESP32.6 NEXT.3 NEXT.5 R18.2
PLAY/PAUSE: ESP32.9 PLAY.3 PLAY.5 R17.2
PREV_TRACK: ESP32.8 PREV.3 PREV.5 R16.2
RESET: ESP32.3 ESP32_RESET.2 Q1.3 R12.1
RGB_DIN: RGB.2
RX-LED: ESP32-RX.1 U1.17
SD_MODE_LEFT: R14.1 U3.4
SD_MODE_RIGHT: R19.1 U4.4
SDCARD_CDA: microSD.9
SDCARD_CLK: microSD.5 U5.2 | length 16.4
  Top Layer w0.254: U5.2 21.825,15.05 23.713,13.163 microSD.5
SDCARD_CS: microSD.2 R20.2 U5.6 | length 27
  Top Layer w0.254: R20.2 24.365,24.91 24.775,24.5 25.75,24.5 26.275,23.975 26.275,20.925 26.905,20.295 U5.6 26.905,14.98 25.8,13.875 25.8,9.225 27.013,8.012 microSD.2
SDCARD_DI: microSD.3 U5.4 | length 16.2
  Top Layer w0.254: U5.4 24.365,14.235 25.25,13.35 25.25,8.775 25.913,8.112 microSD.3
TX-LED: ESP32-TX.1 U1.10
UART_DTR: Q2.2 R1.2 U1.1
UART_RTS: Q1.2 R2.2 U1.2
USBC-DM: U1.12 USB.2 | length 7.2
  Top Layer w0.254: U1.12 37.777,15.048 39.2,13.625 USB.2
USBC-DP: U1.11 USB.3 | length 10.1
  Top Layer w0.254: U1.11 37.142,14.933 37.775,14.3 37.775,10.625 38.225,10.175 38.738,10.175 39.783,9.13 USB.3
pads on no net: ESP32.4 ESP32.5 ESP32.7 ESP32.13 ESP32.14 ESP32.16 ESP32.17 ESP32.18 ESP32.19 ESP32.20 ESP32.21 ESP32.22 ESP32.23 ESP32.24 ESP32.26 ESP32.27 ESP32.28 ESP32.32 ESP32.33 ESP32_BOOT.1 ESP32_BOOT.4 ESP32_RESET.1 ESP32_RESET.4 LEFT.MH1 LEFT.MH2 microSD.1 microSD.8 microSD.10 microSD.13 microSD.14 RGB.M1 RGB.M2 RIGHT.MH1 RIGHT.MH2 U1.5 U1.7 U1.8 U1.9 U1.18 U1.19 U3.2 U3.5 U3.6 U3.12 U3.13 U4.2 U4.5 U4.6 U4.12 U4.13 U5.12 U5.13 U5.15 U5.16 USB.4

## Keep-outs
Keep-Out Layer:
  the board outline again, w1